# Altium PCB Sensor.PcbDoc
Units mm, origin at the board's own origin, x right, y up, seen from the top; angles counter-clockwise.
Board outline 161 x 85 mm, 2 copper layers (Top Layer, Bottom Layer); 72 components, 29 nets, 182 pads, 67 vias.
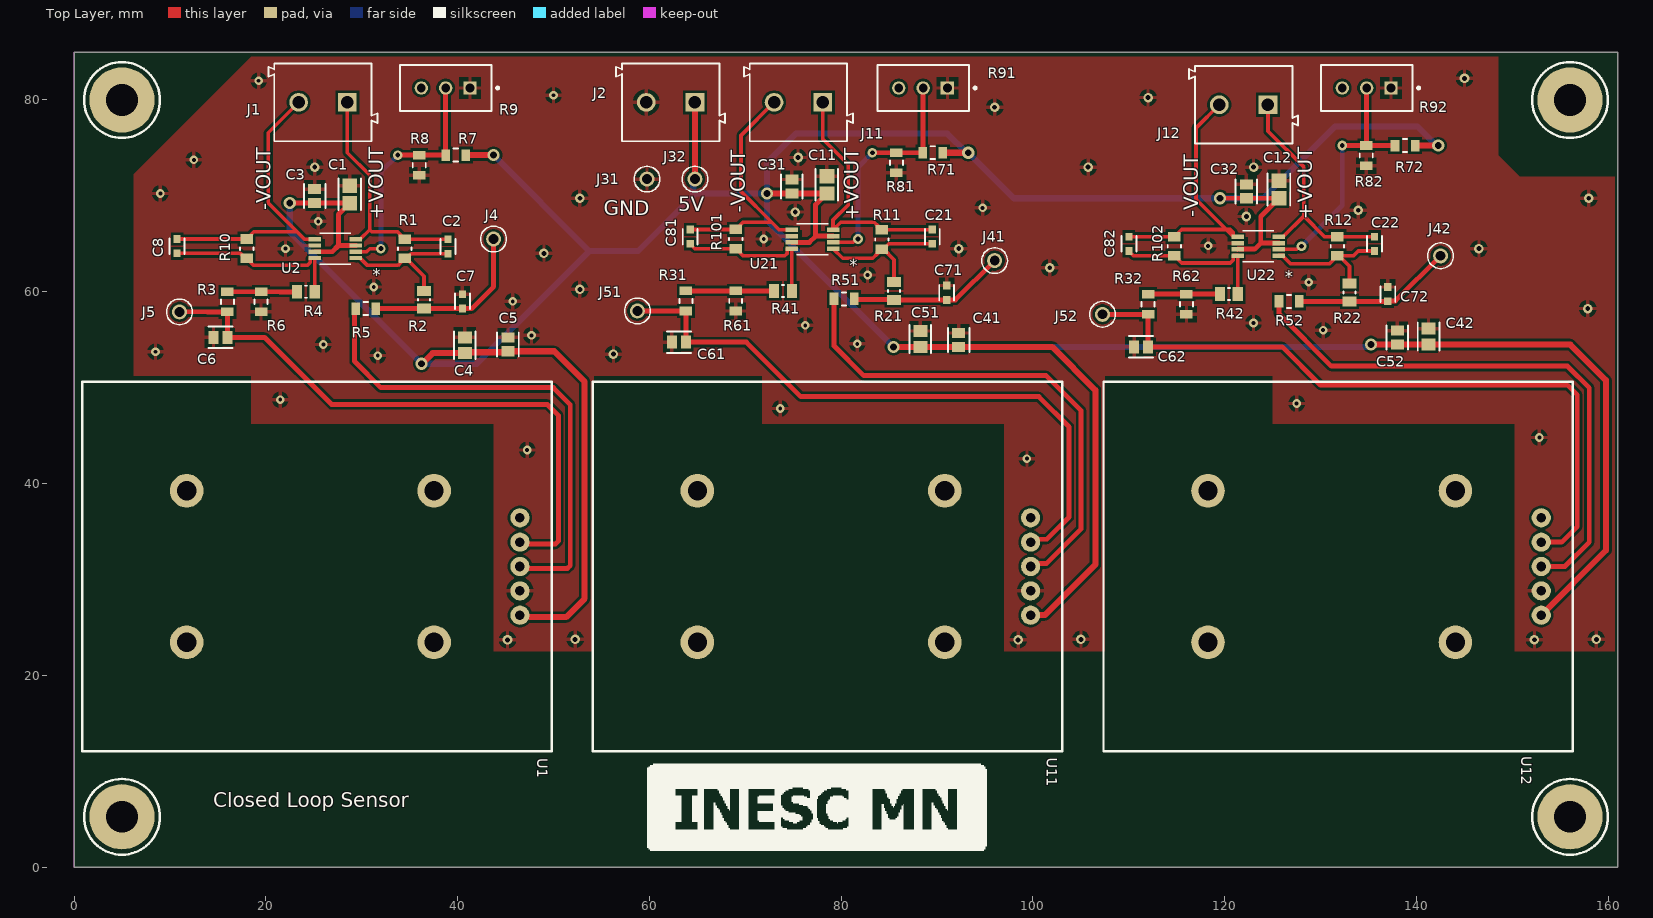
[diagram p0: Top Layer view]
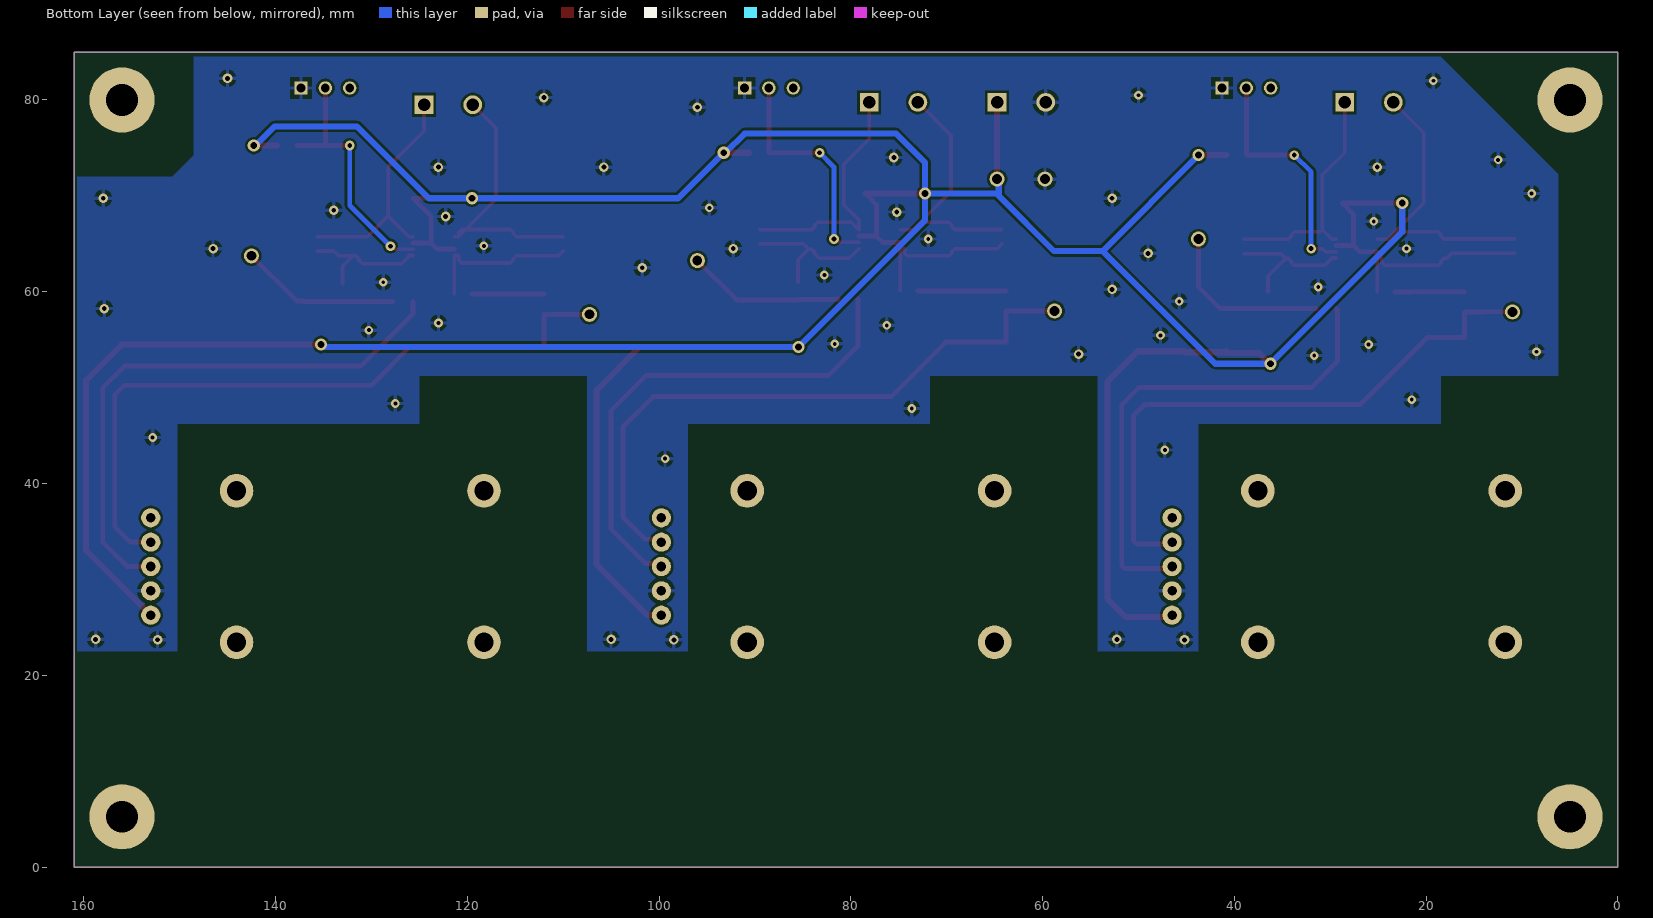
[diagram p1: Bottom Layer view, seen from below]
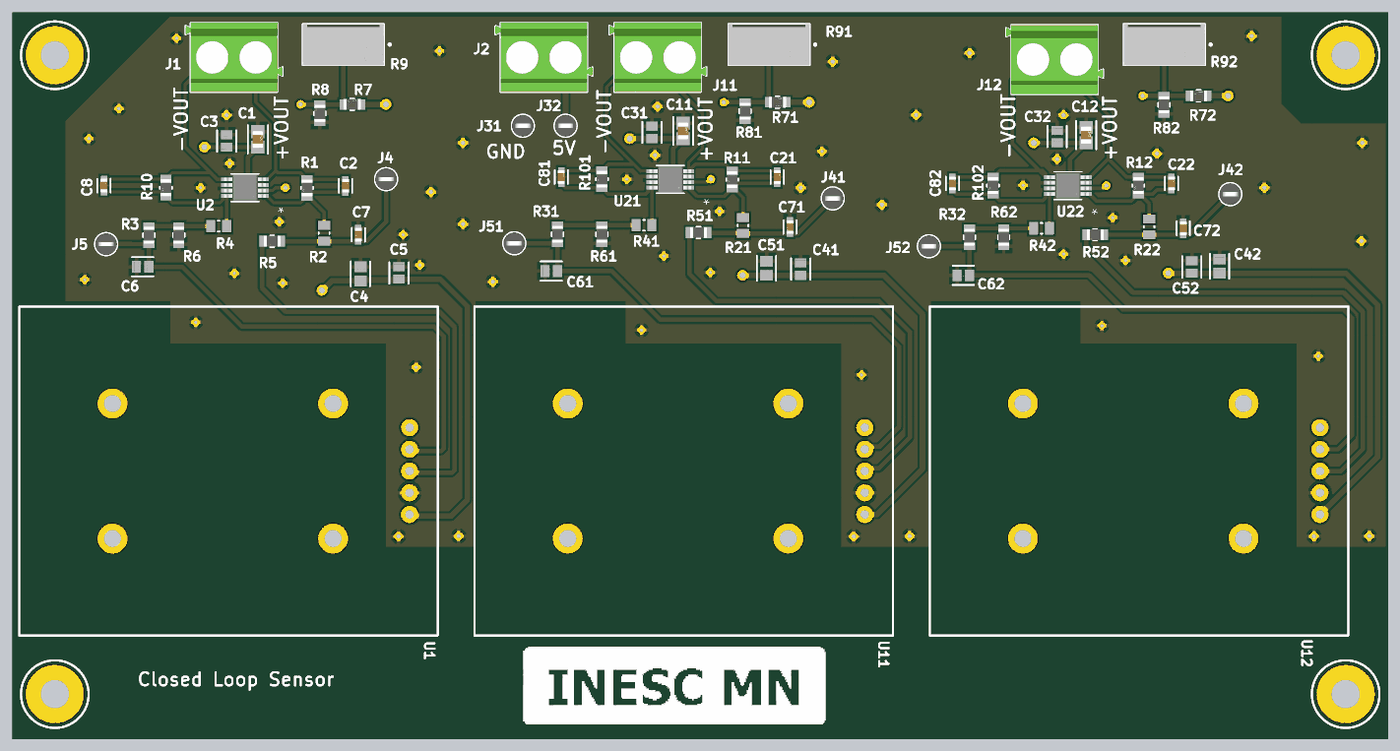
[diagram p2: 3D render of the assembled board from above, using the file's embedded part models]

## Layer stack, top to bottom
Top Solder: solder mask 0.0102, Solder Resist, Dk 3.5
Top Layer: signal copper 0.0356
Dielectric 1: dielectric 0.32, FR-4, Dk 4.8
Bottom Layer: signal copper 0.0356
Bottom Solder: solder mask 0.0102, Solder Resist, Dk 3.5

## Board outline
0,0 161,0 161,85 0,85

## Design rules (kind name [scope] priority, off if disabled: settings)
Clearance Clearance_IC [(InComponent('U2') OR InComponent('U21') OR InComponent('U22'))] p1: gap=0.15 ignorepadtopadclearanceinfootprint=TRUE except(0: Arc-Hole Track-Hole SMDPad-Hole THPad-Hole Via-Hole Fill-Hole Poly-Hole Region-Hole Text-Hole)
Clearance Clearance_1 [InNet('VCC') vs InNetClass('IC_connections')] p2: gap=0.15 ignorepadtopadclearanceinfootprint=TRUE except(0: Arc-Hole Track-Hole SMDPad-Hole THPad-Hole Via-Hole Fill-Hole Poly-Hole Region-Hole Text-Hole)
Clearance [All] p3: gap=0.254 ignorepadtopadclearanceinfootprint=TRUE except(0: Arc-Hole Track-Hole SMDPad-Hole THPad-Hole Via-Hole Fill-Hole Poly-Hole Region-Hole Text-Hole)
HoleSize HoleSize_1 [Not (InNetClass('All Nets'))] p1: absolutevalues=TRUE maxlimit=20.4 minlimit=0.025 maxpercent=80.000 minpercent=20.000
HoleSize [All] p2: absolutevalues=TRUE maxlimit=2.56 minlimit=0.025 maxpercent=80.000 minpercent=20.000
PolygonConnect [All] p1: connectstyle=Relief reliefconductorwidth=0.4 reliefentries=4 polygonreliefangle="90 Angle" airgapwidth=0.4
RoutingVias [All] p1: holewidth=0.5 width=1 viastyle="Through Hole" minholewidth=0.4 minwidth=0.9 maxholewidth=0.712 maxwidth=1.28
SilkToSolderMaskClearance SilkToSolderMaskClearance_1 [HasFootprint('FP-CL21-IPC_C') vs HasFootprint('FP-CL21-IPC_C')] p1: minsilkscreentomaskgap=0.001 clearancetoexposedcopper=TRUE
SilkToSolderMaskClearance [IsPad] p2: minsilkscreentomaskgap=0.254 clearancetoexposedcopper=TRUE
SolderMaskExpansion [All] p1: expansion=0.102 istentingtop=FALSE
Width [All] p1: maxlimit=0.64 minlimit=0.38 preferedwidth=0.51 minimp=50.000000 maximp=50.000000 favimp=50.000000
28 further rules are at their usual default settings.

## Classes and differential pairs
net class IC_connections: NetC2_1 NetC2_2 NetC8_1 NetC8_2 NetC21_1 NetC21_2 NetC22_1 NetC22_2 NetC81_1 NetC81_2 NetC82_1 NetC82_2 VOCM VOCM1 VOCM2

## Components (designator, comment, footprint, x,y, rotation, side; value= is the part's Value field where it differs from the comment)
C1 "0805YC105KAT2A" FP-0805-L_2_01_0_2-W_1_25-IPC_A 28.75,70.156 r90 top
C2 "06035A100JAT2A" FP-0603-L_1_6_0_15-W_0_81-MFG 39,64.725 r90 top
C3 "CL21B104KACNNNC" FP-CL21-IPC_C 25.1,69.976 r90 top
C4 "CL21A106KPFNNNG" FP-CL21-IPC_B 40.75,54.424 r90 top
C5 "CL21B104KACNNNC" FP-CL21-IPC_C 45.25,54.524 r90 top
C6 "CL21B104KACNNNC" FP-CL21-IPC_C 15.274,55.25 r180 top
C7 "06035A100JAT2A" FP-0603-L_1_6_0_15-W_0_81-MFG 40.5,59 r270 top
C8 "06035A100JAT2A" FP-0603-L_1_6_0_15-W_0_81-MFG 10.75,64.75 r90 top
C11 "0805YC105KAT2A" FP-0805-L_2_01_0_2-W_1_25-IPC_A 78.5,71.156 r90 top
C12 "0805YC105KAT2A" FP-0805-L_2_01_0_2-W_1_25-IPC_A 125.65,70.656 r90 top
C21 "06035A100JAT2A" FP-0603-L_1_6_0_15-W_0_81-MFG 89.5,65.75 r90 top
C22 "06035A100JAT2A" FP-0603-L_1_6_0_15-W_0_81-MFG 135.625,65 r90 top
C31 "CL21B104KACNNNC" FP-CL21-IPC_C 74.85,70.976 r90 top
C32 "CL21B104KACNNNC" FP-CL21-IPC_C 122.25,70.476 r90 top
C41 "CL21A106KPFNNNG" FP-CL21-IPC_B 88.25,55.076 r90 top
C42 "CL21A106KPFNNNG" FP-CL21-IPC_B 141.25,55.326 r90 top
C51 "CL21B104KACNNNC" FP-CL21-IPC_C 92.25,54.976 r90 top
C52 "CL21B104KACNNNC" FP-CL21-IPC_C 138,55.226 r90 top
C61 "CL21B104KACNNNC" FP-CL21-IPC_C 63.073,54.75 r180 top
C62 "CL21B104KACNNNC" FP-CL21-IPC_C 111.274,54.25 r180 top
C71 "06035A100JAT2A" FP-0603-L_1_6_0_15-W_0_81-MFG 91,59.9 r270 top
C72 "06035A100JAT2A" FP-0603-L_1_6_0_15-W_0_81-MFG 137,59.75 r270 top
C81 "06035A100JAT2A" FP-0603-L_1_6_0_15-W_0_81-MFG 64.25,65.75 r90 top
C82 "06035A100JAT2A" FP-0603-L_1_6_0_15-W_0_81-MFG 110,65 r90 top
J1 "691213510002" 691213510002 25.96,79.75 r180 top
J2 "5V Input" 691213510002 62.21,79.75 r180 top
J4 "5001" FP-5001-MFG#1 43.75,65.5 r0 top
J5 "5001" FP-5001-MFG#2 11,57.9 r0 top
J11 "691213510002" 691213510002 75.54,79.75 r180 top
J12 "691213510002" 691213510002 121.96,79.5 r180 top
J31 "Ground Test Point" FP-5001-MFG#1 59.75,71.75 r0 top
J32 "5V Test Point" FP-5001-MFG#1 64.75,71.75 r0 top
J41 "5001" FP-5001-MFG#1 96,63.25 r0 top
J42 "5001" FP-5001-MFG#1 142.5,63.75 r0 top
J51 "5001" FP-5001-MFG#1 58.75,58 r0 top
J52 "5001" FP-5001-MFG#1 107.25,57.65 r0 top
R1 "RNCP0805FTD1K00" FP-RNCP0805-MFG 34.5,64.475 r90 top
R2 "RK73H2ATTD1331F" RESC2013X60X30NL20T20 36.5,59.175 r270 top
R3 "RMCF0805ZT0R00" FP-RMCF0805-MFG 16,58.95 r90 top
R4 "RK73H2ATTD1331F" RESC2013X60X30NL20T20 24.175,60 r180 top
R5 "RMCF0805ZT0R00" FP-RMCF0805-MFG 30.426,58.241 r180 top
R6 "RMCF0805ZT0R00" FP-RMCF0805-MFG 19.5,58.95 r90 top
R7 "RT0805DRE0710KL" FP-RT0805-MFG 39.8,74.25 r0 top value=10KΩ
R8 "RMCF0805ZT0R00" FP-RMCF0805-MFG 36,73.2 r90 top
R9 "3296W-1-103LF" BOUR-3296W 38.75,81.25 r180 top
R10 "RNCP0805FTD1K00" FP-RNCP0805-MFG 18,64.5 r90 top
R11 "RNCP0805FTD1K00" FP-RNCP0805-MFG 84.25,65.45 r90 top
R12 "RNCP0805FTD1K00" FP-RNCP0805-MFG 131.75,64.75 r90 top
R21 "RK73H2ATTD1331F" RESC2013X60X30NL20T20 85.5,60.075 r270 top
R22 "RK73H2ATTD1331F" RESC2013X60X30NL20T20 133,59.925 r270 top
R31 "RMCF0805ZT0R00" FP-RMCF0805-MFG 63.798,59.05 r90 top
R32 "RMCF0805ZT0R00" FP-RMCF0805-MFG 112,58.7 r90 top
R41 "RK73H2ATTD1331F" RESC2013X60X30NL20T20 73.925,60.1 r180 top
R42 "RK73H2ATTD1331F" RESC2013X60X30NL20T20 120.425,59.75 r180 top
R51 "RMCF0805ZT0R00" FP-RMCF0805-MFG 80.3,59.25 r180 top
R52 "RMCF0805ZT0R00" FP-RMCF0805-MFG 126.7,59 r180 top
R61 "RMCF0805ZT0R00" FP-RMCF0805-MFG 69,59.05 r90 top
R62 "RMCF0805ZT0R00" FP-RMCF0805-MFG 116,58.7 r90 top
R71 "RT0805DRE0710KL" FP-RT0805-MFG 89.55,74.5 r0 top value=10KΩ
R72 "RT0805DRE0710KL" FP-RT0805-MFG 138.8,75.25 r0 top value=10KΩ
R81 "RMCF0805ZT0R00" FP-RMCF0805-MFG 85.75,73.45 r90 top
R82 "RMCF0805ZT0R00" FP-RMCF0805-MFG 134.75,74.2 r90 top
R91 "3296W-1-103LF" BOUR-3296W 88.54,81.25 r180 top
R92 "3296W-1-103LF" BOUR-3296W 134.79,81.25 r180 top
R101 "RNCP0805FTD1K00" FP-RNCP0805-MFG 69,65.5 r90 top
R102 "RNCP0805FTD1K00" FP-RNCP0805-MFG 114.75,64.75 r90 top
U1 "STB-LA/Z" STB_pad_SMT 46.5,36.43 r270 top
U2 "MCP6D11-E/MS" MSOP8_MS_MCH#1 27.25,64.5 r180 top
U11 "STB-LA/Z" STB_pad_SMT 99.75,36.43 r270 top
U12 "STB-LA/Z" STB_pad_SMT 153,36.43 r270 top
U21 "MCP6D11-E/MS" MSOP8_MS_MCH#2 77,65.475 r180 top
U22 "MCP6D11-E/MS" MSOP8_MS_MCH#2 123.5,64.75 r180 top

## Footprints (in the part's own frame and the unit in brackets; to place one, negate y for a bottom-side part, rotate by r counter-clockwise, add the part's x,y. Pads: shape width x height; smd on the part's side, far side on the other; paste and mask are expansions set on the pad)
691213510002 [mm] "Serie 2135 - 5.08 mm _ 2 pins"
  rect 1.95x1.95 hole 1.3: 1(-2.54,0)
  round 1.95 hole 1.3: 2(2.54,0)
  silkscreen extent -5.68,-4.05 5.68,4.05, body extent -5.68,-4.05 5.68,4.05, height 10.1
BOUR-3296W [mm] "THD, 3-Leads, Body 9.53x4.83mm, Pitch 2.54mm"
  rect 1.4x1.4 hole 0.9: 1(-2.54,0)
  round 1.4 hole 0.9: 2(0,0) 3(2.54,0)
  silkscreen extent -5.54,-2.41 4.77,2.42, body extent -4.76,-2.4 4.76,2.42, height 11.55
FP-0603-L_1_6_0_15-W_0_81-MFG [mm]
  rect 0.8x0.75 smd paste+0 mask+0: 1(-0.75,0) 2(0.75,0)
  silkscreen extent -0.8,-0.77 0.8,0.77, body extent -1.25,-0.58 1.25,0.58, height 0.25
FP-0805-L_2_01_0_2-W_1_25-IPC_A [mm]
  rect 1.505x1.556 smd paste+0 mask+0: 1(-0.906,0) 2(0.906,0)
  silkscreen extent -1.66,-1.18 1.66,1.18, body extent -2.16,-1.28 2.16,1.28, height 0.25
FP-5001-MFG#1 [mm]
  round 1.57 hole 1.016 paste-1000 mask+0: 1(0,0)
  silkscreen extent -1.35,-1.34 1.35,1.34, body extent -1.45,-1.45 1.45,1.45, height 0.25
FP-5001-MFG#2 [mm]
  round 1.57 hole 1.016 mask+0: 1(0,0)
  silkscreen extent -1.35,-1.34 1.35,1.34, body extent -1.45,-1.45 1.45,1.45, height 0.25
FP-CL21-IPC_B [mm]
  rect 1.255x1.456 smd paste+0 mask+0: 1(-0.826,0) 2(0.826,0)
  silkscreen extent -1.45,-1.13 1.45,1.13, body extent -1.7,-0.98 1.7,0.98, height 0.25
FP-CL21-IPC_C [mm]
  rect 1.055x1.356 smd paste+0 mask+0: 1(-0.726,0) 2(0.726,0)
  silkscreen extent -1.25,-1.12 1.25,1.12, body extent -1.35,-0.82 1.35,0.82, height 0.25
FP-RMCF0805-MFG [mm]
  rect 0.9x1.3 smd paste+0 mask+0: 1(-1.05,0) 2(1.05,0)
  silkscreen extent -0.22,-0.67 0.22,0.68, body extent -1.6,-0.77 1.6,0.77, height 0.25
FP-RNCP0805-MFG [mm]
  rect 1x1.3 smd paste+0 mask+0: 1(-1,0) 2(1,0)
  silkscreen extent -0.13,-0.7 0.13,0.7, body extent -1.6,-0.8 1.6,0.8, height 0.25
FP-RT0805-MFG [mm]
  rect 0.9x1.2 smd paste+0 mask+0: 1(-1.05,0) 2(1.05,0)
  silkscreen extent -0.23,-0.67 0.23,0.68, body extent -1.6,-0.77 1.6,0.77, height 0.25
MSOP8_MS_MCH#1 [mm]
  rect 1.302x0.456 smd paste+0 mask+0: 2(-2.15,0.325) 3(-2.15,-0.325) 4(-2.15,-0.975) 5(2.15,-0.975) 6(2.15,-0.325) 7(2.15,0.325) 8(2.15,0.975) "  "(-2.15,0.975)
  silkscreen extent -1.63,-1.63 1.63,1.63, body extent -2.45,-1.5 2.45,1.5, height 1.09
MSOP8_MS_MCH#2 [mm]
  rect 1.302x0.456 smd paste+0 mask+0: 1(-2.15,0.975) 2(-2.15,0.325) 3(-2.15,-0.325) 4(-2.15,-0.975) 5(2.15,-0.975) 6(2.15,-0.325) 7(2.15,0.325) 8(2.15,0.975)
  silkscreen extent -1.63,-1.63 1.63,1.63, body extent -2.45,-1.5 2.45,1.5, height 1.09
RESC2013X60X30NL20T20 [mm] "Chip Resistor, 2-Leads, Body 2.00x1.25mm, IPC Medium Density"
  rect 1.05x1.45 smd: 1(-0.925,0) 2(0.925,0)
  silkscreen extent -0.1,-0.62 0.1,0.62, body extent -1.1,-0.72 1.1,0.72, height 0.6
STB_pad_SMT [mm]
  round 2 hole 1: 1(10.16,0) 2(7.62,0) 3(5.08,0) 4(2.54,0) 5(0,0)
  round 3.5 hole 2: ""(-2.82,-8.95) ""(-2.82,-34.75) ""(12.98,-8.95) ""(12.98,-34.75)
  silkscreen extent -14.17,-45.65 24.33,3.3

## Part data
C1 C11 C12: library part CMP-2007-04655-2, "General Purpose Ceramic Capacitor, 0805, 1uF, 10%, X7R, 15%, 16V", Capacitance=1uF, Case Code (Imperial)=0805, Case Code (Metric)=2012, Dielectric=X7R, Dielectric Material=Ceramic, Max Operating Temperature=125°C, Min Operating Temperature=-55°C, Package Quantity=1, Tolerance=10%, Voltage=16V, Case/Package=0805, Construction=Flat, Contact Plating=Tin, Depth=1.25mm, Dissipation Factor=3.5%, Height=1.4mm, Lead Free="Lead Free", Length=2.01mm, Mount="Surface Mount", Number of Pins=2, Packaging="Tape and Reel", Radiation Hardening=No, REACH SVHC="No SVHC", RoHS Compliant=Yes, Series=-, Termination=SMD/SMT, Thickness=0.055inch, Voltage Rating=16V, Voltage Rating (DC)=16V, Width=0.049inch
C2 C7 C8 C21 C22 C71 C72 C81 C82: library part CMP-2006-04215-2, "General Purpose Ceramic Capacitor, 0603, 10pF, 5%, NP0, 30ppm/°C, 50V", Capacitance=10pF, Case Code (Imperial)=0603, Case Code (Metric)=1608, Dielectric=C0G, Dielectric Material=Ceramic, Insulation Resistance=100GR, Max Operating Temperature=125°C, Min Operating Temperature=-55°C, Package Quantity=1, Temperature Coefficient=30ppm/°C, Tolerance=5%, Voltage=50V, Case/Package=0603, Contact Plating=Tin, Depth=0.81mm, Height=0.63mm, Lead Free="Lead Free", Length=1.6mm, Mount="Surface Mount", Number of Pins=2, Packaging="Tape and Reel", Radiation Hardening=No, REACH SVHC="No SVHC", RoHS Compliant=Yes, Termination=SMD/SMT, Thickness=0.035inch, Voltage Rating=50V, Voltage Rating (DC)=50V, Width=0.032inch
C3 C5 C6 C31 C32 C51 C52 C61 C62: library part CMP-13271-002854-1, "CL21 Series 0805 100nF 25V ±10% Tolerance X7R Multilayer Ceramic Chip Capacitor", Capacitance=100nF, Case Code (Imperial)=0805, Case Code (Metric)=2012, Dielectric=X7R, Max Operating Temperature=125°C, Min Operating Temperature=-55°C, Package Quantity=1, Tolerance=10%, Voltage=25V, Case/Package=0805, Contact Plating=Tin, Depth=1.25mm, Height=0.85mm, Length=2mm, Mount="Surface Mount", Packaging="Tape and Reel", Radiation Hardening=No, Thickness=0.037inch, Voltage Rating=25V, Width=0.049inch
C4 C41 C42: library part CMP-13271-001796-1, "CL21 Series 0805 10uF 10V ±10% Tolerance X5R Multilayer Ceramic Chip Capacitor", Capacitance=10uF, Case Code (Imperial)=0805, Case Code (Metric)=2012, Dielectric=X5R, Max Operating Temperature=85°C, Min Operating Temperature=-55°C, Package Quantity=3000, Tolerance=10%, Voltage=10V, Case/Package=0805, Depth=1.25mm, Height=1.25mm, Lead Free="Lead Free", Length=2mm, Mount="Surface Mount", Packaging="Tape and Reel", Radiation Hardening=No, Termination=Wraparound, Thickness=0.053inch, Voltage Rating=10V, Width=0.049inch
J1 J11 J12: library part CMP-1502-02597-1, "Serie 2135 - 5.08 mm Horizontal Entry Modular with Rising Cage Clamp WR-TBL, 2 pin", Manufacturer="Wurth Elektronik", Operating Temperature=-30to120degC, Datasheet URL=http://katalog.we-online.de/em/datasheet/6912135100xx.pdf, Manufacturer URL=http://www.we-online.de, Mounting Technology=THT, Package Reference=691213510002, Packaging=Box, Part Number=691213510002, Pin Number=2, Pitch=5.08mm, Publisher=WurthElektronik
J2: library part CMP-1502-02597-1, "Serie 2135 - 5.08 mm Horizontal Entry Modular with Rising Cage Clamp WR-TBL, 2 pin", Manufacturer="Wurth Elektronik", Operating Temperature=-30to120degC, Package Reference=691213510002, Datasheet URL=http://katalog.we-online.de/em/datasheet/6912135100xx.pdf, Manufacturer URL=http://www.we-online.de, Mounting Technology=THT, Packaging=Box, Part Number=691213510002, Pin Number=2, Pitch=5.08mm, Publisher=WurthElektronik
J4 J5 J31 J32 J41 J42 J51 J52: library part CMP-2000-05181-2, "PC TEST POINT MINIATURE BLACK", Color=Black, Flammability Rating="UL94 V-0", Package Quantity=100, Body Material=Bronze, Contact Material=Bronze, Contact Plating=Silver, Diameter=2.54mm, Height=0.3inch, Hole Diameter=1.6mm, Housing Color=Black, Inside Diameter=1.27mm, Insulation=Insulated, Insulation Material=Nylon, Lead Free="Lead Free", Length=7.62mm, Material=Nylon, Mount="Through Hole", Number of Contacts=1, Number of Ports=1, Orientation=Straight, Outside Diameter=2.54mm, Packaging=Bulk, Plating=Silver, REACH SVHC="No SVHC", RoHS Compliant=Yes, Series=THM, Termination="Through Hole"
R1 R10 R11 R12 R101 R102: library part CMP-26527-001902-1, "1kΩ ±1% 0.25W 0805 High Power Anti-Sulfur Thin Film Chip Resistor", Case Code (Imperial)=0805, Case Code (Metric)=2012, Max Operating Temperature=155°C, Max Power Dissipation=250mW, Min Operating Temperature=-55°C, Resistance=1kR, Resistor Type="Thin Film", Temperature Coefficient=100ppm/°C, Tolerance=1%, Case/Package=0805, Features="Moisture Resistant", Height=0.024inch, Lead Free="Lead Free", Length=0.079inch, Mount="Surface Mount", Number of Terminations=2, Packaging="Tape and Reel", Power Rating=250mW, RoHS Compliant=Yes, Series=RNCP, Size Code=0805, Width=0.049inch
R2 R4 R21 R22 R41 R42: library part CMP-2001-02064-1, Manufacturer="KOA Speer", Part Number=RK73H2ATTD1331F
R3 R5 R6 R8 R31 R32 R51 R52 R61 R62 R81 R82: library part CMP-26527-000017-1, "RES 0 OHM JUMPER 1/8W 0805", Case Code (Imperial)=0805, Case Code (Metric)=2012, Max Operating Temperature=155°C, Max Power Dissipation=125mW, Min Operating Temperature=-55°C, Resistance=0mR, Case/Package=0805, Composition="Thick Film", Contact Plating=Tin, Depth=1.25mm, Features="Automotive AEC-Q200", Height=0.026inch, Lead Free="Lead Free", Length=2mm, Military Standard=Not, Mount="Surface Mount", Number of Terminations=2, Packaging="Tape and Reel", Power Rating=125mW, Radiation Hardening=No, Width=0.049inch
R7 R71 R72: library part CMP-2001-01785-2, "RES 10.0K OHM 1/8W .5% SMD 0805", Manufacturer=Yageo, Package=RT0805, Power Rating=0.125W, Resistance=10KΩ, Temperature="-55°C to +155°C", Temperature Coefficient="50 ppm/°C", Temperature Range High=+155°C, Temperature Range Low=-55°C, Tolerance=0.01, Voltage Rating=150V, Automotive=No, Category=Res, ComponentLink2Description=Datasheet, ComponentLink2URL=http://www.yageo.com/documents/recent/PYu-RT_1-to-0.01_RoHS_L_9.pdf, Composition="Thin Film", Device Class L1="Passive Components", Device Class L2=Resistors, Device Class L3="Chip SMD Resistors", Digikey Description="RES 10.0K OHM 1/8W .5% SMD 0805", Footprint Url=http://www.yageo.com/exep/pages/download/literatures/PYu-R_Mount_10.pdf, Height=0.6mm, Ipc Land Pattern Name=RESC200125X50, Lead Free=Yes, Manufacturer Part Number=RT0805DRE0710KL, Mouser Description="Res Thin Film 0805 10K Ohm 0.5% 1/8W ±50ppm/°C Molded SMD Paper T/R", Octopart=https://octopart.com/rt0805dre0710kl-yageo-1180739, RoHS=TRUE, Series=RT
R9 R91 R92: library part CMP-1747-00001-1, "Square Trimpot(R) Trimming Potentiometer, 10 KOhm, +/- 10%, 0.5 W, -55 to 125 degC, 3-Pin THD, RoHS, Tube", Case Code (Imperial)=0603, Case Code (Metric)=1608, Max Operating Temperature="155 degC", Min Operating Temperature="-55 degC", Package Quantity=5000, Power Rating="100 mW", Resistance="120 Ohm", Tolerance=1%, Type (Resistor)="Thick Film", Voltage Rating="75 V", Case\Package=0603, ComponentLink1Description="Manufacturer URL", ComponentLink1URL=http://www.bourns.com/, ComponentLink2Description=Datasheet, ComponentLink2URL=http://www.bourns.com/docs/Product-Datasheets/3296.pdf, DatasheetVersion=May-16, Height="0.45 mm", Length="1.55 mm", Mount="Surface Mount", PackageDescription="3-Pin Through Hole Device, Body 9.53 x 4.83 mm, Pitch 2.54 mm", PackageReference=3296W, Packaging="Tape and Reel", Pins=2, Radiation Hardening=No, REACH SVHC=Unknown, RoHSCompliant=true, Weight="7.1E-05 oz", Width="0.85 mm"
U2 U21 U22: "No Description Available", Mfr_Name=Microchip, Supplier Part Number 1=1880231P, Copyright="Copyright (C) 2022 Ultra Librarian. All rights reserved.", Manufacturer_Part_Number=MCP6D11-E/MS, RefDes=RefDes, Supplier 1=RSComponents, Type=DEV

## Free pads (board coordinates)
  round 6.8 hole 3.32: 2(5,5.25) 2(5,80) 2(156,5.25) 2(156,80)

## Via types
v1: diameter 1, hole 0.5, Top Layer to Bottom Layer, 31 vias
v2: diameter 0.9, hole 0.4, Top Layer to Bottom Layer, 27 vias
v3: diameter 1.27, hole 0.711, Top Layer to Bottom Layer, 9 vias

## Nets (pads, with @x,y where several pads share a name; then routed paths per layer and width w, separated by ;. In a path a pad name is that pad's centre, name@x,y a point inside that pad or via, vN(x,y) a via of type N, cw(c..) or ccw(c..) an arc to the next point about the centre after c; other vN are vias at no path point)
GND: C1.2 C3.2 C4.2 C5.2 C6.2 C7.1 C11.2 C12.2 C31.2 C32.2 C41.2 C42.2 C51.2 C52.2 C61.2 C62.2 C71.1 C72.1 J2.2 J31.1 R6.1 R8.1 R9.1 R61.1 R62.1 R81.1 R82.1 R91.1 R92.1 U1.2 U2.6 U11.2 U12.2 U21.6 U22.6 | length 0.1
  Top Layer w0.64: J2.2 J2.2@59.71,79.71 ; J31.1@59.71,71.79 J31.1
  other v1: 45.2,23.7 98.45,23.7 152.288,23.714 52.25,23.75 105,23.75 158.75,23.75 56.25,53.5 157.847,58.25 52.75,60.25 101.75,62.5 49,64 92.25,64.5 146.5,64.5 122.25,67.85 75.209,68.311 133.92,68.5 52.75,69.75 157.95,69.75 25.1,73 105.75,73 123,73 75.5,74 96,79.25 112,80.25 145,82.25
  other v2: 99.366,42.603 47.25,43.5 152.802,44.798 73.646,47.834 127.491,48.35 21.5,48.75 31.676,53.348 8.5,53.75 26,54.5 81.681,54.571 47.7,55.45 130.25,56 76.25,56.5 123,56.75 45.75,59 31.25,60.5 128.75,61 82.75,61.75 22.055,64.495 118.266,64.784 71.915,65.497 25.464,67.339 94.75,68.75 9,70.25 12.5,73.75 50,80.5 19.25,82
NetC2_1: "U2.  " C2.1 R1.1 R2.1 | length 14.7
  Top Layer w0.38: 29.425,63.5 29.4,63.525 29.823,63.525 30.598,62.75 33.775,62.75 34.04,63.015 34.04,63.165 34.35,63.475 34.65,63.475 36.5,61.625 R2.1 ; R1.1@34.675,63.5 35.15,63.975 C2.1
  Top Layer w0.51: R2.1 R2.1@36.525,60.1
NetC2_2: C2.2 J1.1 R1.2 U2.4 | length 24.8
  Top Layer w0.38: J1.1 28.5,74.5 30.825,72.175 30.825,66.477 ; U2.4 29.823,65.475 30.825,66.477 ; C2.2 34.35,65.475 34.04,65.785 34.04,65.935 33.725,66.25 31.052,66.25 30.825,66.477
NetC6_1: C6.1 J5.1 R3.1 U1.4 | length 61.8
  Top Layer w0.51: J5.1 11.012,57.912 13.919,57.912 13.931,57.9 R3.1 C6.1 19.86,55.25 26.86,48.25 49.358,48.25 50.5,47.108 50.5,33.989 50.201,33.69 47.5,33.69
NetC7_2: C7.2 J4.1 R2.2 R5.1 | length 18.2
  Top Layer w0.51: R5.1 36.492,58.242 R2.2@36.496,58.246 ; R2.2 R2.2@36.496,58.246 ; J4.1 43.75,60.539 41.461,58.25 C7.2 40.5,58.242 36.5,58.242 R2.2@36.496,58.246
NetC8_1: C8.1 R4.1 R10.1 U2.8 | length 18.9
  Top Layer w0.38: C8.1 17.35,64 R10.1@17.838,63.512 ; R10.1 18.15,63.5 18.46,63.19 18.46,63.04 18.75,62.75 24.325,62.75 24.639,63.064 24.639,63.487 24.677,63.525 U2.8 R4.1
NetC8_2: C8.2 J1.2 R10.2 U2.5 | length 31
  Top Layer w0.38: C8.2 R10.2 ; R10.2@18.15,65.5 18.46,65.81 18.46,65.96 18.75,66.25 23.25,66.25 ; J1.2 20.25,76.58 20.25,69.25 23.25,66.25 ; U2.5 24.677,65.475 24.025,65.475 23.25,66.25
NetC21_1: C21.1 R11.1 R21.1 U21.1 | length 15.4
  Top Layer w0.38: U21.1 80.15,63.5 83.3,63.5 83.79,63.99 83.79,64.14 84.1,64.45 R11.1@84.4,64.45 ; R21.1 85.5,63.35 R11.1@84.4,64.45 ; C21.1 84.95,65 R11.1@84.4,64.45
NetC21_2: C21.2 J11.1 R11.2 U21.4 | length 26.2
  Top Layer w0.38: J11.1 78.08,75.92 80.75,73.25 80.75,69.083 79.15,67.483 U21.4 79.95,67.25 83.45,67.25 83.79,66.91 83.79,66.76 84.1,66.45 R11.2 84.275,66.475 89.475,66.475 C21.2
NetC22_1: C22.1 R12.1 R22.1 U22.1 | length 14.2
  Top Layer w0.38: U22.1 126.073,63.775 126.111,63.737 126.111,63.663 126.844,62.929 130.929,62.929 131.29,63.29 131.29,63.44 131.6,63.75 R12.1 ; R22.1 133,62.65 131.9,63.75 133.42,63.75 133.92,64.25 C22.1
NetC22_2: C22.2 J12.1 R12.2 U22.4 | length 24.9
  Top Layer w0.38: J12.1 124.5,76.75 128.25,73 128.25,70.339 128.249,70.338 128.249,67.901 ; U22.4 126.073,65.725 128.249,67.901 ; C22.2 130.4,65.75 128.249,67.901
NetC61_1: C61.1 J51.1 R31.1 U11.4 | length 66.5
  Top Layer w0.51: J51.1 R31.1 C61.1 70.11,54.75 75.796,49.064 100.608,49.064 103.75,45.922 103.75,36.5 101.44,34.19 U11.4@99.5,34.19
NetC62_1: C62.1 J52.1 R32.1 U12.4 | length 73.1
  Top Layer w0.51: J52.1 R32.1 C62.1 125.984,54.25 129.984,50.25 155.75,50.25 156.75,49.25 156.75,35.5 155.14,33.89 U12.4
NetC71_2: C71.2 J41.1 R21.2 R51.1 | length 16.4
  Top Layer w0.51: R51.1 81.4,59.2 85.45,59.2 R21.2 C71.2 91.9,59.15 J41.1
NetC72_2: C72.2 J42.1 R22.2 R52.1 | length 16.7
  Top Layer w0.51: R52.1 R22.2 C72.2 137.043,59.043 137.793,59.043 J42.1
NetC81_1: C81.1 R41.1 R101.1 U21.8 | length 16.2
  Top Layer w0.38: C81.1 64.25,64.975 64.725,64.5 69.15,64.5 69.46,64.19 69.46,64.04 69.75,63.75 74.1,63.75 74.389,64.039 74.389,64.462 74.427,64.5 U21.8 R41.1
NetC81_2: C81.2 J11.2 R101.2 U21.5 | length 27
  Top Layer w0.38: C81.2 69.15,66.5 69.46,66.81 69.46,66.96 69.75,67.25 72.75,67.25 ; J11.2 69.555,76.305 69.555,70.445 72.75,67.25 ; 73.55,66.45 72.75,67.25 ; 73.55,66.475 74.402,66.475 74.427,66.45 U21.5 U21.5@74.402,66.45
NetC82_1: C82.1 R42.1 R102.1 U22.8 | length 16.6
  Top Layer w0.38: C82.1 110,64.225 110.475,63.75 114.9,63.75 115.21,63.44 115.21,63.29 115.5,63 120.575,63 120.889,63.314 120.889,63.737 120.927,63.775 U22.8 ; R42.1 U22.8
NetC82_2: C82.2 J12.2 R102.2 U22.5 | length 29.1
  Top Layer w0.38: C82.2 R102.2 114.9,65.75 115.21,66.06 115.21,66.21 115.5,66.5 120.152,66.5 ; J12.2 117,77.08 117,69.652 120.152,66.5 ; 120.152,66.5 120.575,66.5 120.889,66.186 120.889,65.763 U22.5@120.927,65.725 ; 120.152,66.5 120.915,65.737 U22.5@120.927,65.725 ; U22.5@120.927,65.725 U22.5 U22.5@120.927,65.725
NetR3_2: R3.2 R4.2 R6.2 | length 7.3
  Top Layer w0.51: R3.2 R6.2 21.458,60 21.463,59.995 23.25,59.995 R4.2
NetR5_2: R5.2 U1.3 | length 51.1
  Top Layer w0.51: R5.2 29.25,58.115 29.25,52.75 32,50 49.978,50 51.75,48.228 51.75,31.449 51.451,31.15 47.5,31.15
NetR31_2: R31.2 R41.2 R61.2 | length 9.2
  Top Layer w0.51: R31.2 R61.2 R41.2
NetR32_2: R32.2 R42.2 R62.2 | length 7.5
  Top Layer w0.51: R32.2 R62.2 R42.2
NetR51_2: R51.2 U11.3 | length 52.9
  Top Layer w0.51: R51.2 79.2,59.2 79.25,59.15 79.25,54.361 82.361,51.25 101.372,51.25 105.019,47.603 105.019,35.269 101.4,31.65 U11.3@99.5,31.65
NetR52_2: R52.2 U12.3 | length 59
  Top Layer w0.51: R52.2 125.65,57.698 131.099,52.25 155.734,52.25 158,49.984 158,33.89 155.46,31.35 U12.3
VCC: C1.1 C3.1 C4.1 C5.1 C11.1 C12.1 C31.1 C32.1 C41.1 C42.1 C51.1 C52.1 J2.1 J32.1 R7.2 R71.2 R72.2 U1.1 U2.3 U2.7 U11.1 U12.1 U21.3 U21.7 U22.3 U22.7 | length 449.7
  Top Layer w0.51: v3(22.5,69.25) C3.1 C1.1@28.724,69.25 ; U2.7 26.933,64.175 27.583,64.825 ; C1.1 C1.1@28.724,69.25 ; U2.3 27.583,64.825 ; U21.7 76.683,65.15 77.333,65.8 ; C11.1 78.474,70.25 77.977,69.753 77.977,69.727 77.333,69.083 77.333,65.8 ; U21.3 77.333,65.8 ; v3(119.5,69.75) C32.1 C12.1@125.624,69.75 ; U22.7 121.367,64.442 123.117,64.442 123.75,65.075 ; U22.3 123.75,65.075 ; C12.1 C12.1@125.624,69.75 ; 27.583,64.825 27.583,68.083 28.227,68.727 28.227,68.753 C1.1@28.724,69.25 ; 123.75,65.075 123.75,67.85 125.127,69.227 125.127,69.253 C12.1@125.624,69.75
  Top Layer w0.64: v3(36.25,52.5) 36.309,52.5 37.407,53.598 40.65,53.598 40.85,53.798 C4.1@40.95,53.698 ; C4.1 40.85,53.698 C4.1@40.95,53.698 ; R7.2 v3(43.75,74.25) ; 47.5,26.07 51.32,26.07 53.25,28 53.25,50.625 50.077,53.798 C5.1 45.15,53.698 C4.1@40.95,53.698 ; J32.1 J2.1 ; v3(72.25,70.25) C31.1 C11.1@78.474,70.25 ; v3(85.45,54.25) C41.1 C51.1 102,54.25 106.5,49.75 106.5,31.557 101.228,26.284 99.764,26.284 U11.1 ; R71.2 v3(93.25,74.5) ; v3(135.25,54.5) C52.1 C42.1 156.034,54.5 159.75,50.784 159.75,33.02 U12.1 ; R72.2 v3(142.25,75.25)
  Bottom Layer w0.64: v3(22.5,69.25) 22.5,66.25 v3(36.25,52.5) 42,52.5 53.75,64.25 ; v3(43.75,74.25) 53.75,64.25 ; J32.1 64.572,71.572 64.572,70.013 ; v3(135.25,54.5) 135.08,54.5 134.83,54.25 v3(85.45,54.25) 72.25,67.45 v3(72.25,70.25) ; v3(142.25,75.25) 142.08,75.25 140.08,77.25 131.5,77.25 124,69.75 v3(119.5,69.75) 98,69.75 v3(93.25,74.5) 93.08,74.5 91.08,76.5 75.285,76.5 72.25,73.465 v3(72.25,70.25) ; 53.75,64.25 58.809,64.25 64.572,70.013 ; 64.572,70.013 64.809,70.25 v3(72.25,70.25)
VOCM: R7.1 R8.2 R9.2 U2.2 | length 25.2
  Top Layer w0.38: U2.2 30.5,64.175 30.825,64.5 v1(32,64.5)
  Top Layer w0.51: v1(33.75,74.25) R8.2 37.459,74.25 37.465,74.244 38.75,74.244 R7.1 R9.2
  Bottom Layer w0.51: v1(32,64.5) 32,72.5 v1(33.75,74.25)
VOCM1: R71.1 R81.2 R91.2 U21.2 | length 24.4
  Top Layer w0.38: U21.2 81.232,65.15 81.582,65.5 v1(81.75,65.5)
  Top Layer w0.51: v1(83.25,74.5) R81.2 R71.1 88.52,74.52 88.52,81.23 R91.2
  Bottom Layer w0.51: v1(81.75,65.5) 81.75,73 v1(83.25,74.5)
VOCM2: R72.1 R82.2 R92.2 U22.2 | length 26.3
  Top Layer w0.38: U22.2 127.507,64.425 127.832,64.75 v1(128,64.75)
  Top Layer w0.51: v1(132.25,75.25) R82.2 ; R92.2 134.77,81.23 134.77,75.27 R82.2 ; R72.1 R82.2
  Bottom Layer w0.51: v1(128,64.75) 132.25,69 v1(132.25,75.25)
pads on no net: R9.3 R91.3 R92.3 U1. U1.5 U11. U11.5 U12. U12.5

## Polygon pours and split planes (outlines as drawn)
GND on Top Layer "GND_L01_P014" (solid, pour order 14): 6.25,72.25 6.25,51.25 18.5,51.25 18.5,51 18.5,50.75 18.5,46.25 43.75,46.25 43.75,22.5 54.069,22.5 54.071,22.497 54.186,22.612 54.186,51.253 71.747,51.253 71.75,51.25 71.75,46.25 97,46.25 97,22.5 107.5,22.5 107.5,51.25 125,51.25 125,46.25 150.25,46.25 150.25,22.5 160.75,22.5 160.75,72 150.75,72 148.5,74.25 148.5,84.5 18.5,84.5
GND on Bottom Layer "GND_L02_P015" (solid, pour order 15): 6.25,72.25 6.25,51.25 18.5,51.25 18.5,46.25 43.75,46.25 43.75,22.5 54.25,22.5 54.25,51.25 71.75,51.25 71.75,46.25 97,46.25 97,22.5 107.5,22.5 107.5,51.25 125,51.25 125,46.25 150.25,46.25 150.25,22.5 160.75,22.5 160.75,72 150.75,72 148.5,74.25 148.5,84.5 18.5,84.5

## Keep-outs
Keep-Out Layer:
  the board outline again, w0.1

## Silkscreen, mask and mechanical layers (free items; w line width, h text height)
Top Overlay:
  circle w0.254: c156,80 r3.953
  circle w0.254: c156,5.25 r3.953
  circle w0.254: c5,5.25 r3.953
  circle w0.254: c5,80 r3.953
  region: 25 vertices and 7 holes, not listed, extent 59.796,1.724 95.165,10.789
  text "-VOUT" at 20.496,68.504 h1.52 r90
  text "5V" at 63.011,68.42 h1.52
  text "-VOUT" at 69.996,68.254 h1.52 r90
  text "GND" at 55.254,68.004 h1.52
  text "-VOUT" at 117.246,67.754 h1.52 r90
  text "+VOUT" at 32.246,67.504 h1.52 r90
  text "+VOUT" at 129.141,67.512 h1.52 r90
  text "+VOUT" at 81.849,67.392 h1.52 r90
  text "Closed Loop Sensor" at 14.504,6.262 h1.52

## Text inside footprints (layer, text, board x,y; h text height)
U2: Top 3D Body "*" at 28.685,64.348 h1.27 r180; Top Overlay "*" at 32,62.874 h1.27 r180
U21: Top 3D Body "*" at 78.435,65.323 h1.27 r180; Top Overlay "*" at 81.75,63.849 h1.27 r180
U22: Top 3D Body "*" at 124.935,64.598 h1.27 r180; Top Overlay "*" at 127.164,62.672 h1.27 r180